# Altium PCB SD171-6.0PCB4.PcbDoc (part 5 of 11)
Units mil, origin at the board's own origin, x right, y up, seen from the top; angles counter-clockwise.
Board outline 5995 x 3921.26 mil, 6 copper layers (Top Layer, GND, Mid-Layer 1, Mid-Layer 2, VCC, Bottom Layer); 477 components, 539 nets, 2143 pads, 1050 vias.
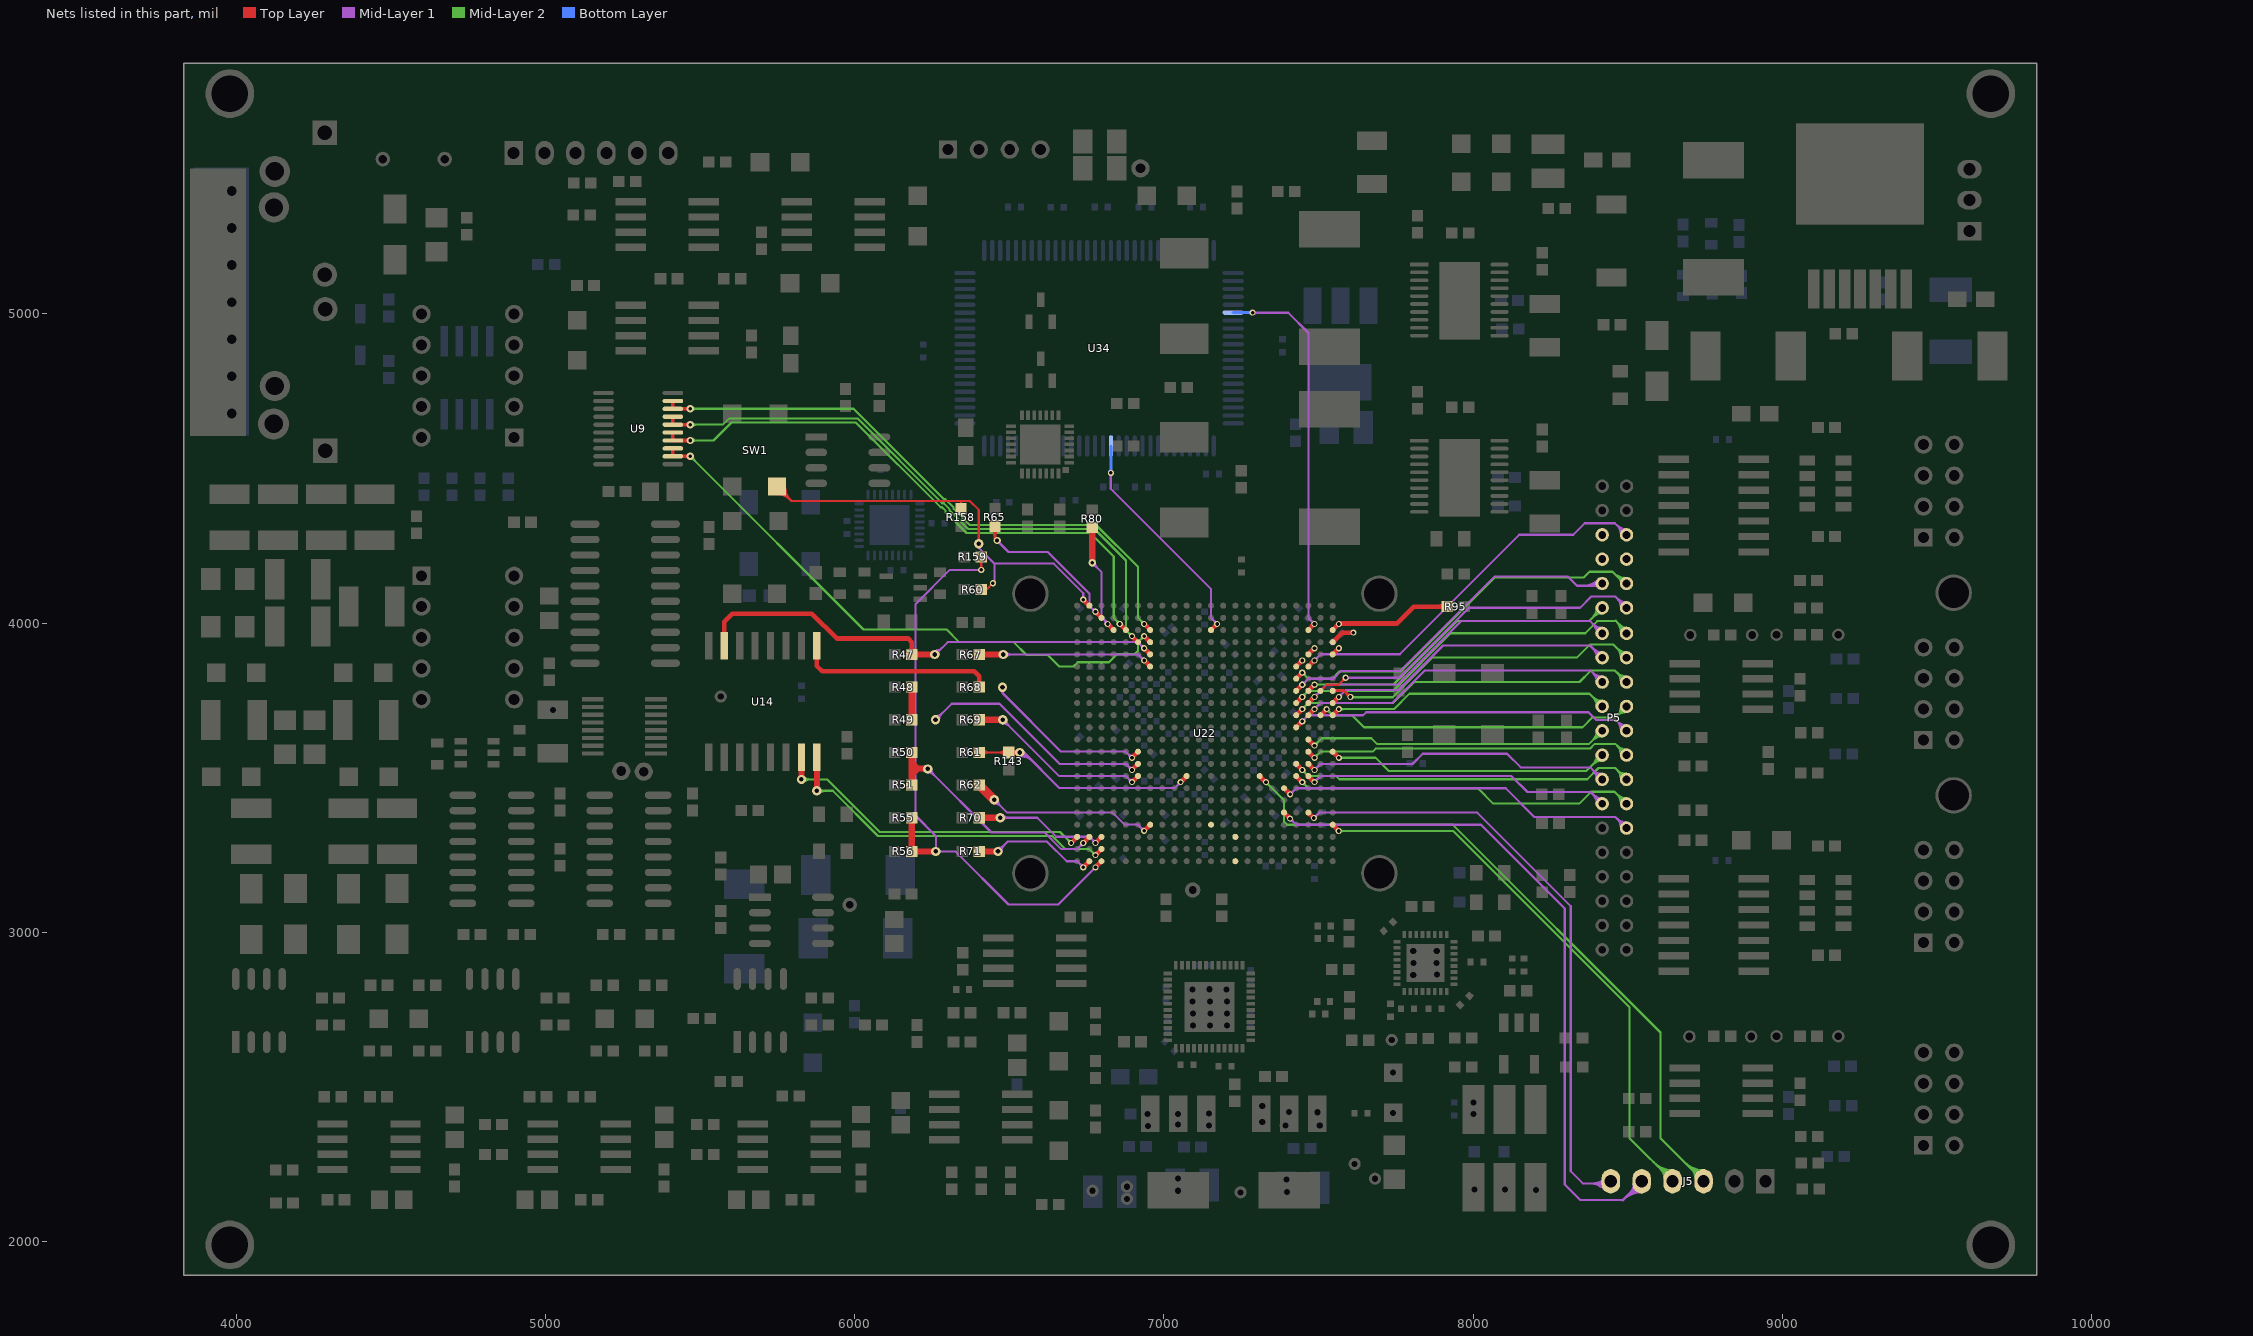
[diagram p9: the nets of this part, all layers, seen from the top]

## Via types
v1: diameter 19.68, hole 11.81, Top Layer to Bottom Layer, 521 vias
v2: diameter 50, hole 25, Top Layer to Bottom Layer, 162 vias
v3: diameter 30, hole 15, Top Layer to Bottom Layer, 100 vias
v4: diameter 39.37, hole 19.68, Top Layer to Bottom Layer, 74 vias
v5: diameter 31.5, hole 15.75, Top Layer to Bottom Layer, 44 vias
v6: diameter 40, hole 20, Top Layer to Bottom Layer, 38 vias
v7: diameter 24, hole 12, Top Layer to Bottom Layer, 33 vias
v8: diameter 47.24, hole 23.62, Top Layer to Bottom Layer, 24 vias
v9: diameter 59.06, hole 31.5, Top Layer to Bottom Layer, 10 vias
v10: diameter 60, hole 30, Top Layer to Bottom Layer, 9 vias
v11: diameter 25.98, hole 12.99, Top Layer to Bottom Layer, tented top, 9 vias
v12: diameter 23.62, hole 11.81, Top Layer to Bottom Layer, 8 vias
v13: diameter 20, hole 12, Top Layer to Bottom Layer, 6 vias
v14: diameter 50, hole 27.56, Top Layer to Bottom Layer, 4 vias
v15: diameter 51.18, hole 27.56, Top Layer to Bottom Layer, 2 vias
v16: diameter 39.37, hole 23.62, Top Layer to Bottom Layer, 2 vias
v17: diameter 80, hole 40, Top Layer to Bottom Layer, 1 vias
v18: diameter 47.24, hole 19.68, Top Layer to Bottom Layer, 1 vias
v19: diameter 47.24, hole 27.56, Top Layer to Bottom Layer, 1 vias
v20: diameter 22.05, hole 11.81, Top Layer to Bottom Layer, 1 vias

## Nets (pads, with @x,y where several pads share a name; then routed paths per layer and width w, separated by ;. In a path a pad name is that pad's centre, name@x,y a point inside that pad or via, vN(x,y) a via of type N, cw(c..) or ccw(c..) an arc to the next point about the centre after c; other vN are vias at no path point) (continued)
FIO6: P5.12 U22.E16 | length 1336.9
  Top Layer w15: U22.E16@7388.52,3465.45 v1(7408.21,3445.76)
  Mid-Layer 1 w7: v1(7408.21,3445.76) 7427.55,3465.1 8105.9,3465.1 8198.5,3372.5 8460.66,3372.5 P5.12@8496.74,3336.42 ; P5.12@8478.59,3336.42 ccw(c8434.76,3336.42) 8465.75,3367.41 ccw(c8496.74,3398.4) P5.12@8496.74,3354.57 ; P5.12@8485.59,3336.42 ccw(c8458.66,3336.42) 8477.7,3355.46 ccw(c8496.74,3374.5) P5.12@8496.74,3347.57 ; 7419.03,3456.59 cw(c7408.21,3467.42) 7408.21,3452.1 ccw(c7408.21,3467.42) 7419.03,3456.59 ; 7419.03,3456.59 ccw(c7429.86,3445.76) 7414.55,3445.76 cw(c7429.86,3445.76) 7419.03,3456.59
FIO7: P5.13 U22.C15 | length 1163.1
  Top Layer w15: U22.C15@7467.26,3504.82 v1(7486.95,3485.13)
  Mid-Layer 1 w7: v1(7486.95,3485.13) 7506.29,3504.47 8124.53,3504.47 8176,3453 8380.16,3453 P5.13@8418,3415.16 ; P5.13@8399.85,3415.16 ccw(c8356.02,3415.16) 8387.01,3446.15 ccw(c8418,3477.14) P5.13@8418,3433.31 ; P5.13@8406.85,3415.16 ccw(c8379.92,3415.16) 8398.96,3434.2 ccw(c8418,3453.24) P5.13@8418,3426.31 ; 7497.77,3495.96 cw(c7486.95,3506.79) 7486.95,3491.47 ccw(c7486.95,3506.79) 7497.77,3495.96 ; 7497.77,3495.96 ccw(c7508.6,3485.13) 7493.29,3485.13 cw(c7508.6,3485.13) 7497.77,3495.96
FIO8: P5.14 U22.D15 | length 1297
  Top Layer w15: U22.D15@7427.89,3504.82 v1(7447.58,3485.13)
  Mid-Layer 2 w7: v1(7447.58,3485.13) 7467.6,3465.1 7534.33,3465.1 7534.43,3465 8016,3465 8065.34,3415.66 8343.66,3415.66 8382,3454 8457.9,3454 P5.14@8496.74,3415.16 ; P5.14@8478.59,3415.16 ccw(c8434.76,3415.16) 8465.75,3446.15 ccw(c8496.74,3477.14) P5.14@8496.74,3433.31 ; P5.14@8485.59,3415.16 ccw(c8458.66,3415.16) 8477.7,3434.2 ccw(c8496.74,3453.24) P5.14@8496.74,3426.31 ; 7458.4,3474.3 cw(c7469.23,3485.13) 7453.92,3485.13 ccw(c7469.23,3485.13) 7458.4,3474.3 ; 7458.4,3474.3 ccw(c7447.58,3463.48) 7447.58,3478.79 cw(c7447.58,3463.48) 7458.4,3474.3
FIO9: P5.15 U22.C14 | length 1174.3
  Top Layer w15: U22.C14@7467.26,3544.19 v1(7486.95,3524.5)
  Mid-Layer 1 w7: v1(7486.95,3524.5) 7506.44,3544 7804,3544 7837,3577 8110,3577 8154,3533 8378.9,3533 P5.15@8418,3493.9 ; P5.15@8399.85,3493.9 ccw(c8356.02,3493.9) 8387.01,3524.89 ccw(c8418,3555.88) P5.15@8418,3512.05 ; P5.15@8406.85,3493.9 ccw(c8379.92,3493.9) 8398.96,3512.94 ccw(c8418,3531.98) P5.15@8418,3505.05 ; 7497.77,3535.33 cw(c7486.95,3546.16) 7486.95,3530.84 ccw(c7486.95,3546.16) 7497.77,3535.33 ; 7497.77,3535.33 ccw(c7508.6,3524.5) 7493.29,3524.5 cw(c7508.6,3524.5) 7497.77,3535.33
FIO10: P5.16 U22.D14 | length 1279.2
  Top Layer w15: U22.D14@7427.89,3544.19 v1(7447.58,3524.5)
  Mid-Layer 2 w7: v1(7447.58,3524.5) 7467.6,3504.47 7557.53,3504.47 7567.6,3494.4 8369.4,3494.4 8406,3531 8459.64,3531 P5.16@8496.74,3493.9 ; P5.16@8478.59,3493.9 ccw(c8434.76,3493.9) 8465.75,3524.89 ccw(c8496.74,3555.88) P5.16@8496.74,3512.05 ; P5.16@8485.59,3493.9 ccw(c8458.66,3493.9) 8477.7,3512.94 ccw(c8496.74,3531.98) P5.16@8496.74,3505.05 ; 7458.4,3513.67 cw(c7469.23,3524.5) 7453.92,3524.5 ccw(c7469.23,3524.5) 7458.4,3513.67 ; 7458.4,3513.67 ccw(c7447.58,3502.85) 7447.58,3518.16 cw(c7447.58,3502.85) 7458.4,3513.67
FIO11: P5.17 U22.A13 | length 1092.5
  Top Layer w15: U22.A13@7546,3583.56 v1(7565.69,3563.87)
  Mid-Layer 2 w7: v1(7565.69,3563.87) 7684.9,3563.87 7727.77,3521 8325,3521 ; 8339,3521 8325,3521 ; P5.17@8399.85,3572.64 cw(c8356.02,3572.64) 8387.01,3541.65 cw(c8418,3510.66) P5.17@8418,3554.48 ; P5.17@8406.85,3572.64 cw(c8379.92,3572.64) 8398.96,3553.6 cw(c8418,3534.56) P5.17@8418,3561.48 ; P5.17@8418,3572.64 8366.36,3521 8325,3521 ; 7581,3563.87 cw(c7581,3579.19) 7570.17,3568.36 ccw(c7581,3579.19) 7581,3563.87 ; 7581,3563.87 ccw(c7581,3548.56) 7570.17,3559.39 cw(c7581,3548.56) 7581,3563.87
FIO12: P5.18 U22.C13 | length 1230.6
  Top Layer w15: U22.C13@7467.26,3583.56 v1(7486.95,3563.87)
  Mid-Layer 2 w7: v1(7486.95,3563.87) 7506.97,3583.9 7675.9,3583.9 7685.5,3593.5 8378.51,3593.5 8394.01,3609 8460.38,3609 P5.18@8496.74,3572.64 ; P5.18@8478.59,3572.64 ccw(c8434.76,3572.64) 8465.75,3603.63 ccw(c8496.74,3634.62) P5.18@8496.74,3590.79 ; P5.18@8485.59,3572.64 ccw(c8458.66,3572.64) 8477.7,3591.68 ccw(c8496.74,3610.72) P5.18@8496.74,3583.79 ; 7497.77,3574.7 cw(c7486.95,3585.53) 7486.95,3570.22 ccw(c7486.95,3585.53) 7497.77,3574.7 ; 7497.77,3574.7 ccw(c7508.6,3563.87) 7493.29,3563.87 cw(c7508.6,3563.87) 7497.77,3574.7
FIO13: P5.19 U22.C12 | length 1153.8
  Top Layer w15: U22.C12@7467.26,3622.93 v1(7486.95,3603.24)
  Mid-Layer 2 w7: v1(7486.95,3603.24) 7510.7,3627 7671,3627 7690,3608 8374.62,3608 P5.19@8418,3651.38 ; P5.19@8399.85,3651.38 cw(c8356.02,3651.38) 8387.01,3620.39 cw(c8418,3589.4) P5.19@8418,3633.22 ; P5.19@8406.85,3651.38 cw(c8379.92,3651.38) 8398.96,3632.34 cw(c8418,3613.3) P5.19@8418,3640.22 ; 7497.77,3614.07 cw(c7486.95,3624.9) 7486.95,3609.59 ccw(c7486.95,3624.9) 7497.77,3614.07 ; 7497.77,3614.07 ccw(c7508.6,3603.24) 7493.29,3603.24 cw(c7508.6,3603.24) 7497.77,3614.07
FIO14: P5.20 U22.D11 | length 1277
  Top Layer w15: U22.D11@7427.89,3662.3 v1(7447.58,3681.99)
  Mid-Layer 1 w7: v1(7447.58,3681.99) 7466.92,3701.33 7564.52,3701.33 7564.69,3701.5 7644.5,3701.5 7654.5,3711.5 8354,3711.5 ; 8357.64,3711.5 8354,3711.5 ; P5.20@8478.59,3651.38 ccw(c8434.76,3651.38) 8465.75,3682.37 ccw(c8496.74,3713.36) P5.20@8496.74,3669.53 ; P5.20@8485.59,3651.38 ccw(c8458.66,3651.38) 8477.7,3670.42 ccw(c8496.74,3689.46) P5.20@8496.74,3662.53 ; P5.20@8496.74,3651.38 8462.12,3686 8399,3686 8373.5,3711.5 8354,3711.5 ; 7458.4,3692.81 cw(c7447.58,3703.64) 7447.58,3688.33 ccw(c7447.58,3703.64) 7458.4,3692.81 ; 7458.4,3692.81 ccw(c7469.23,3681.99) 7453.92,3681.99 cw(c7469.23,3681.99) 7458.4,3692.81
FIO15: P5.21 U22.A10 | length 1076.9
  Top Layer w15: U22.A10@7546,3701.67 v1(7565.69,3721.36)
  Mid-Layer 2 w7: v1(7565.69,3721.36) 7744.36,3721.36 7794,3771 8377.12,3771 P5.21@8418,3730.12 ; P5.21@8399.85,3730.12 ccw(c8356.02,3730.12) 8387.01,3761.11 ccw(c8418,3792.1) P5.21@8418,3748.27 ; P5.21@8406.85,3730.12 ccw(c8379.92,3730.12) 8398.96,3749.16 ccw(c8418,3768.2) P5.21@8418,3741.27 ; 7581,3721.36 cw(c7581,3736.67) 7570.17,3725.84 ccw(c7581,3736.67) 7581,3721.36 ; 7581,3721.36 ccw(c7581,3706.04) 7570.17,3716.87 cw(c7581,3706.04) 7581,3721.36
FIO16: P5.22 U22.B10 | length 1209.9
  Top Layer w15: U22.B10@7506.63,3701.67 v1(7526.32,3721.36)
  Mid-Layer 2 w7: v1(7526.32,3721.36) 7546.34,3701.33 7608.67,3701.33 7647.5,3662.5 8354.5,3662.5 8386,3694 8460.62,3694 P5.22@8496.74,3730.12 ; P5.22@8478.59,3730.12 cw(c8434.76,3730.12) 8465.75,3699.13 cw(c8496.74,3668.14) P5.22@8496.74,3711.97 ; P5.22@8485.59,3730.12 cw(c8458.66,3730.12) 8477.7,3711.08 cw(c8496.74,3692.04) P5.22@8496.74,3718.97 ; 7537.14,3710.53 cw(c7547.97,3721.36) 7532.66,3721.36 ccw(c7547.97,3721.36) 7537.14,3710.53 ; 7537.14,3710.53 ccw(c7526.32,3699.7) 7526.32,3715.01 cw(c7526.32,3699.7) 7537.14,3710.53
FIO17: P5.23 U22.C10 | length 1185.2
  Top Layer w15: U22.C10@7467.26,3701.67 v1(7486.95,3721.36)
  Mid-Layer 1 w7: v1(7486.95,3721.36) 7506.29,3740.7 7737.7,3740.7 7843,3846 8380.86,3846 P5.23@8418,3808.86 ; P5.23@8399.85,3808.86 ccw(c8356.02,3808.86) 8387.01,3839.85 ccw(c8418,3870.84) P5.23@8418,3827.01 ; P5.23@8406.85,3808.86 ccw(c8379.92,3808.86) 8398.96,3827.9 ccw(c8418,3846.94) P5.23@8418,3820.01 ; 7497.77,3732.18 cw(c7486.95,3743.01) 7486.95,3727.7 ccw(c7486.95,3743.01) 7497.77,3732.18 ; 7497.77,3732.18 ccw(c7508.6,3721.36) 7493.29,3721.36 cw(c7508.6,3721.36) 7497.77,3732.18
FIO18: P5.24 U22.D10 | length 1303.3
  Top Layer w15: U22.D10@7427.89,3701.67 v1(7447.58,3721.36)
  Mid-Layer 2 w7: v1(7447.58,3721.36) 7466.92,3740.7 7740.7,3740.7 7809.36,3809.36 8344.36,3809.36 8381,3846 8459.6,3846 P5.24@8496.74,3808.86 ; P5.24@8478.59,3808.86 ccw(c8434.76,3808.86) 8465.75,3839.85 ccw(c8496.74,3870.84) P5.24@8496.74,3827.01 ; P5.24@8485.59,3808.86 ccw(c8458.66,3808.86) 8477.7,3827.9 ccw(c8496.74,3846.94) P5.24@8496.74,3820.01 ; 7458.4,3732.18 cw(c7447.58,3743.01) 7447.58,3727.7 ccw(c7447.58,3743.01) 7458.4,3732.18 ; 7458.4,3732.18 ccw(c7469.23,3721.36) 7453.92,3721.36 cw(c7469.23,3721.36) 7458.4,3732.18
FIO19: P5.25 U22.A9 | length 1124.6
  Top Layer w15: U22.A9@7546,3741.04 v1(7565.69,3760.73)
  Mid-Layer 1 w7: v1(7565.69,3760.73) 7587.96,3783 7759,3783 7903,3927 8378.6,3927 P5.25@8418,3887.6 ; P5.25@8399.85,3887.6 ccw(c8356.02,3887.6) 8387.01,3918.59 ccw(c8418,3949.58) P5.25@8418,3905.75 ; P5.25@8406.85,3887.6 ccw(c8379.92,3887.6) 8398.96,3906.64 ccw(c8418,3925.68) P5.25@8418,3898.75 ; 7576.51,3771.55 cw(c7565.69,3782.38) 7565.69,3767.07 ccw(c7565.69,3782.38) 7576.51,3771.55 ; 7576.51,3771.55 ccw(c7587.34,3760.73) 7572.03,3760.73 cw(c7587.34,3760.73) 7576.51,3771.55
FIO20: P5.26 U22.A8 | length 1268.7
  Top Layer w10: U22.A8@7546,3780.41 7547.16,3781.57 7581.43,3781.57 v1@7603,3760 ; U22.A8@7549.42,3776.99 cw(c7560.49,3765.92) 7560.49,3781.57 ccw(c7560.49,3765.92) U22.A8@7549.42,3776.99 ; 7593.49,3769.51 ccw(c7603,3779.01) 7603,3765.57 cw(c7603,3779.01) 7593.49,3769.51 ; 7595.25,3767.75 cw(c7588.22,3760.73) 7598.16,3760.73 ccw(c7588.22,3760.73) 7595.25,3767.75
  Mid-Layer 2 w7: v1@7603,3760 7740,3760 7868.1,3888.1 8336.1,3888.1 8378,3930 8454.34,3930 P5.26@8496.74,3887.6 ; P5.26@8478.59,3887.6 ccw(c8434.76,3887.6) 8465.75,3918.59 ccw(c8496.74,3949.58) P5.26@8496.74,3905.75 ; P5.26@8485.59,3887.6 ccw(c8458.66,3887.6) 8477.7,3906.64 ccw(c8496.74,3925.68) P5.26@8496.74,3898.75 ; v1@7607.48,3756.24 cw(c7616.56,3747.17) 7616.56,3760 ccw(c7616.56,3747.17) v1@7607.48,3756.24 ; v1@7607.48,3765.21 ccw(c7620.06,3777.79) 7620.06,3760 cw(c7620.06,3777.79) v1@7607.48,3765.21
  other v1: 7603,3760.73
FIO21: P5.27 U22.C9 | length 1237
  Top Layer w15: U22.C9@7467.26,3741.04 v1(7486.95,3760.73)
  Mid-Layer 1 w7: v1(7486.95,3760.73) 7527.22,3801 7756.92,3801 7962.92,4007 8377.34,4007 P5.27@8418,3966.34 ; P5.27@8399.85,3966.34 ccw(c8356.02,3966.34) 8387.01,3997.33 ccw(c8418,4028.32) P5.27@8418,3984.49 ; P5.27@8406.85,3966.34 ccw(c8379.92,3966.34) 8398.96,3985.38 ccw(c8418,4004.42) P5.27@8418,3977.49 ; 7497.77,3771.55 cw(c7486.95,3782.38) 7486.95,3767.07 ccw(c7486.95,3782.38) 7497.77,3771.55 ; 7497.77,3771.55 ccw(c7508.6,3760.73) 7493.29,3760.73 cw(c7508.6,3760.73) 7497.77,3771.55
FIO22: P5.28 U22.D9 | length 1347.9
  Top Layer w15: U22.D9@7427.89,3741.04 v1(7447.58,3760.73)
  Mid-Layer 2 w7: v1(7447.58,3760.73) 7466.92,3780.07 7494.96,3780.07 7495.03,3780 7518.24,3780 7518.3,3780.07 7534.33,3780.07 7534.4,3780 7557.61,3780 7557.67,3780.07 7741.07,3780.07 7927.84,3966.84 8362.84,3966.84 8402,4006 8463,4006 8496.74,3972.26 P5.28@8496.74,3966.34 ; 8461.56,4007.44 cw(c8420.47,3966.34) P5.28@8478.59,3966.34 ; 8473.51,3995.49 cw(c8444.37,3966.34) P5.28@8485.59,3966.34 ; 8475.86,3993.14 ccw(c8496.74,4014.03) P5.28@8496.74,3984.49 ; 7458.4,3771.55 cw(c7447.58,3782.38) 7447.58,3767.07 ccw(c7447.58,3782.38) 7458.4,3771.55 ; 7458.4,3771.55 ccw(c7469.23,3760.73) 7453.92,3760.73 cw(c7469.23,3760.73) 7458.4,3771.55
FIO23: P5.29 U22.C8 | length 1245.3
  Top Layer w15: U22.C8@7467.26,3780.41 v1(7486.95,3800.1)
  Mid-Layer 2 w7: v1(7486.95,3800.1) 7487.76,3800.91 7742.91,3800.91 7948,4006 8374.98,4006 P5.29@8418,4049.02 ; P5.29@8399.85,4049.02 cw(c8356.02,4049.02) 8387.01,4018.03 cw(c8418,3987.04) P5.29@8418,4030.86 ; P5.29@8406.85,4049.02 cw(c8379.92,4049.02) 8398.96,4029.98 cw(c8418,4010.94) P5.29@8418,4037.86 ; v1@7491.43,3795.61 cw(c7504.23,3782.82) 7504.23,3800.91 ; v1@7491.43,3795.61 cw(c7504.23,3782.82) 7504.23,3800.91 ; v1@7491.43,3795.61 cw(c7504.23,3782.82) 7504.23,3800.91 ; v1@7491.43,3804.58 ccw(c7500.29,3813.44) 7500.29,3800.91 ; v1@7491.43,3804.58 ccw(c7500.29,3813.44) 7500.29,3800.91 ; v1@7491.43,3804.58 ccw(c7500.29,3813.44) 7500.29,3800.91
FIO24: P5.30 U22.B8 | length 1459.1
  Top Layer w7: U22.B8@7506.63,3780.41 7526.22,3800 7565,3800 v1(7588,3823) ; 7579.79,3816.04 cw(c7589.99,3813.31) v1@7587.87,3823.64 ; 7581.04,3814.79 ccw(c7578.31,3824.99) v1@7588.64,3822.87 ; 7517.46,3791.24 ccw(c7528.28,3780.41) 7512.97,3780.41 cw(c7528.28,3780.41) 7517.46,3791.24 ; 7517.46,3791.24 cw(c7506.63,3802.06) 7506.63,3786.75 ccw(c7506.63,3802.06) 7517.46,3791.24 ; 7577.17,3812.17 cw(c7588,3801.35) v1@7588,3816.66 ; 7577.17,3812.17 ccw(c7566.35,3823) v1@7581.66,3823 ; 7577.17,3812.17 cw(c7588,3801.35) v1@7588,3816.66 ; 7577.17,3812.17 ccw(c7566.35,3823) v1@7581.66,3823 ; 7577.17,3812.17 ccw(c7566.35,3823) v1@7581.66,3823 ; 7577.17,3812.17 cw(c7588,3801.35) v1@7588,3816.66
  Mid-Layer 1 w7: v1(7588,3823) 7760.54,3823 7987.06,4049.52 8346.52,4049.52 8383,4086 8460,4086 8496.74,4049.26 P5.30@8496.74,4049.02 ; 8465.58,4080.42 cw(c8434.17,4049.02) P5.30@8478.59,4049.02 ; 8466.17,4079.83 ccw(c8496.74,4110.41) P5.30@8496.74,4067.17 ; 8477.53,4068.47 cw(c8458.07,4049.02) P5.30@8485.59,4049.02 ; 8478.12,4067.88 ccw(c8496.74,4086.51) P5.30@8496.74,4060.17 ; v1@7592.48,3818.52 cw(c7603.31,3807.69) 7603.31,3823 ; v1@7592.48,3818.52 cw(c7603.31,3807.69) 7603.31,3823 ; v1@7592.48,3818.52 cw(c7603.31,3807.69) 7603.31,3823 ; v1@7592.48,3827.48 ccw(c7603.31,3838.31) 7603.31,3823 ; v1@7592.48,3827.48 ccw(c7603.31,3838.31) 7603.31,3823 ; v1@7592.48,3827.48 ccw(c7603.31,3838.31) 7603.31,3823
FIO25: P5.31 U22.D8 | length 1367.4
  Top Layer w15: U22.D8@7427.89,3780.41 v1(7447.58,3800.1)
  Mid-Layer 1 w7: v1(7447.58,3800.1) 7466.92,3819.44 7548.44,3819.44 7574,3845 7764.15,3845 8069.15,4150 8307,4150 8336.5,4120.5 8410.74,4120.5 P5.31@8418,4127.76 ; 8356.66,4120.5 ccw(c8356.66,4189.1) P5.31@8405.16,4140.59 ; 8373.55,4120.5 ccw(c8373.55,4172.2) P5.31@8410.11,4135.64 ; 8390.45,4120.5 ccw(c8390.45,4155.3) P5.31@8415.06,4130.69 ; 8391.69,4120.5 cw(c8391.69,4101.45) P5.31@8405.16,4114.92 ; v1@7447.58,3806.44 ccw(c7447.58,3821.75) 7458.4,3810.92 ; v1@7447.58,3806.44 ccw(c7447.58,3821.75) 7458.4,3810.92 ; v1@7447.58,3806.44 ccw(c7447.58,3821.75) 7458.4,3810.92 ; v1@7453.92,3800.1 cw(c7469.23,3800.1) 7458.4,3810.92 ; v1@7453.92,3800.1 cw(c7469.23,3800.1) 7458.4,3810.92 ; v1@7453.92,3800.1 cw(c7469.23,3800.1) 7458.4,3810.92
FIO26: P5.32 U22.D7 | length 1436.8
  Top Layer w15: U22.D7@7427.89,3819.78 v1(7447.58,3839.47)
  Mid-Layer 2 w7: v1(7447.58,3839.47) 7467.04,3820 7544,3820 7567,3843 7766.62,3843 8070.62,4147 8358,4147 8377,4166 8451,4166 8489.24,4127.76 P5.32@8496.74,4127.76 ; 8454.75,4162.25 ccw(c8494.3,4201.8) P5.32@8496.14,4145.9 ; 8466.16,4150.84 ccw(c8495.03,4179.7) P5.32@8496.37,4138.9 ; 8471.05,4145.95 cw(c8452.86,4127.76) P5.32@8478.59,4127.76 ; 8477.58,4139.42 ccw(c8495.75,4157.6) P5.32@8496.6,4131.91 ; v1@7447.58,3833.12 cw(c7447.58,3817.81) 7458.4,3828.64 ; v1@7447.58,3833.12 cw(c7447.58,3817.81) 7458.4,3828.64 ; v1@7447.58,3833.12 cw(c7447.58,3817.81) 7458.4,3828.64 ; v1@7453.92,3839.47 ccw(c7469.23,3839.47) 7458.4,3828.64 ; v1@7453.92,3839.47 ccw(c7469.23,3839.47) 7458.4,3828.64 ; v1@7453.92,3839.47 ccw(c7469.23,3839.47) 7458.4,3828.64
FIO27: P5.33
FIO28: P5.34
FIO29: P5.35
FIO30: P5.36 U22.C6 | length 1420.7
  Top Layer w15: U22.C6@7467.26,3859.15 v1(7486.95,3878.84)
  Mid-Layer 1 w7: v1(7486.95,3878.84) 7506.97,3898.86 7762.86,3898.86 8149.74,4285.74 8324,4285.74 8361,4322.74 8361,4323 8458.98,4323 P5.36@8496.74,4285.24 ; P5.36@8478.59,4285.24 ccw(c8434.76,4285.24) 8465.75,4316.23 ccw(c8496.74,4347.22) P5.36@8496.74,4303.39 ; P5.36@8485.59,4285.24 ccw(c8458.66,4285.24) 8477.7,4304.28 ccw(c8496.74,4323.32) P5.36@8496.74,4296.39 ; v1@7486.95,3885.18 ccw(c7486.95,3900.49) 7497.77,3889.66 ; v1@7486.95,3885.18 ccw(c7486.95,3900.49) 7497.77,3889.66 ; v1@7486.95,3885.18 ccw(c7486.95,3900.49) 7497.77,3889.66 ; v1@7493.29,3878.84 cw(c7508.6,3878.84) 7497.77,3889.66 ; v1@7493.29,3878.84 cw(c7508.6,3878.84) 7497.77,3889.66 ; v1@7493.29,3878.84 cw(c7508.6,3878.84) 7497.77,3889.66
FIO31: U22.D6 | length 27.8
  Top Layer w15: U22.D6@7427.89,3859.15 v1(7447.58,3878.84)
FIO32: U22.A5 | length 27.8
  Top Layer w15: U22.A5@7546,3898.52 v1(7565.69,3918.21)
FIO33: U22.C5 | length 27.8
  Top Layer w15: U22.C5@7467.26,3898.52 v1(7486.95,3918.21)
FIO34: U22.A4 | length 79.9
  Top Layer w15: U22.A4@7546,3937.89 7577.11,3969 v1(7613,3969)
FJDQ1A: U9.2 U9.3 U22.T4 | length 2102.1
  Top Layer w11.81: U9.3@5411.2,4565.02 U9.2@5411.2,4539.43 v12(5467.57,4539.43) ; 5453.31,4539.43 cw(c5453.31,4525.18) v12@5463.39,4535.26 ; 5453.31,4539.43 ccw(c5453.31,4553.69) v12@5463.39,4543.61 ; 5453.31,4539.43 cw(c5453.31,4525.18) v12@5463.39,4535.26 ; 5453.31,4539.43 ccw(c5453.31,4553.69) v12@5463.39,4543.61 ; 5453.31,4539.43 ccw(c5453.31,4553.69) v12@5463.39,4543.61 ; 5453.31,4539.43 cw(c5453.31,4525.18) v12@5463.39,4535.26
  Top Layer w15: v1(6935.77,3957.57) U22.T4@6955.45,3937.89
  Mid-Layer 2 w7: v12(5467.57,4539.43) 6028,3979 6297,3979 6338,3938 6514,3938 6555.45,3896.55 6624.45,3896.55 6661.51,3859.49 6707.55,3859.49 6721.06,3873 6822,3873 6847.86,3898.86 6904.4,3898.86 6915.73,3910.19 6915.73,3937.54 v1(6935.77,3957.57) ; v1@6929.42,3957.57 cw(c6914.11,3957.57) 6924.94,3946.75 cw(c6935.77,3935.92) v1@6935.77,3951.23 ; v12@5467.57,4531.12 cw(c5467.57,4511.06) 5481.75,4525.25 ; v12@5467.57,4531.12 cw(c5467.57,4511.06) 5481.75,4525.25 ; v12@5467.57,4531.12 cw(c5467.57,4511.06) 5481.75,4525.25 ; v12@5475.88,4539.43 ccw(c5495.94,4539.43) 5481.75,4525.25 ; v12@5475.88,4539.43 ccw(c5495.94,4539.43) 5481.75,4525.25 ; v12@5475.88,4539.43 ccw(c5495.94,4539.43) 5481.75,4525.25
FJDQ1B: U9.4 U9.5 U22.V3 | length 2146.7
  Top Layer w11.81: U9.5@5411.2,4616.2 U9.4@5411.2,4590.61 v12(5467.57,4590.61) ; 5453.31,4590.61 cw(c5453.31,4576.36) v12@5463.39,4586.44 ; 5453.31,4590.61 ccw(c5453.31,4604.87) v12@5463.39,4594.79 ; 5453.31,4590.61 cw(c5453.31,4576.36) v12@5463.39,4586.44 ; 5453.31,4590.61 ccw(c5453.31,4604.87) v12@5463.39,4594.79 ; 5453.31,4590.61 ccw(c5453.31,4604.87) v12@5463.39,4594.79 ; 5453.31,4590.61 cw(c5453.31,4576.36) v12@5463.39,4586.44
  Top Layer w15: v1(6857.02,3996.95) U22.V3@6876.71,3977.26
  Mid-Layer 2 w7: v12(5467.57,4590.61) 5542.61,4590.61 5601,4649 6003,4649 6277.49,4374.51 6282.09,4374.51 6293.51,4363.09 6293.51,4358.49 6361,4291 6762,4291 6837.68,4215.32 6837.68,4016.29 v1(6857.02,3996.95) ; v12@5473.44,4584.74 cw(c5487.63,4570.55) 5487.63,4590.61 ; v12@5473.44,4584.74 cw(c5487.63,4570.55) 5487.63,4590.61 ; v12@5473.44,4584.74 cw(c5487.63,4570.55) 5487.63,4590.61 ; v12@5473.44,4596.49 ccw(c5487.63,4610.68) 5487.63,4590.61 ; v12@5473.44,4596.49 ccw(c5487.63,4610.68) 5487.63,4590.61 ; v12@5473.44,4596.49 ccw(c5487.63,4610.68) 5487.63,4590.61 ; 6846.19,4007.77 cw(c6835.37,3996.95) v1@6850.68,3996.95 ; 6846.19,4007.77 ccw(c6857.02,4018.6) v1@6857.02,4003.29 ; 6846.19,4007.77 cw(c6835.37,3996.95) v1@6850.68,3996.95 ; 6846.19,4007.77 ccw(c6857.02,4018.6) v1@6857.02,4003.29 ; 6846.19,4007.77 ccw(c6857.02,4018.6) v1@6857.02,4003.29 ; 6846.19,4007.77 cw(c6835.37,3996.95) v1@6850.68,3996.95
FJDQ2A: U9.6 U9.7 U22.U4 | length 2207.2
  Top Layer w11.81: U9.7@5411.2,4667.39 U9.6@5411.2,4641.8 v12(5467.57,4641.8) ; 5453.31,4641.8 cw(c5453.31,4627.54) v12@5463.39,4637.62 ; 5453.31,4641.8 ccw(c5453.31,4656.05) v12@5463.39,4645.97 ; 5453.31,4641.8 cw(c5453.31,4627.54) v12@5463.39,4637.62 ; 5453.31,4641.8 ccw(c5453.31,4656.05) v12@5463.39,4645.97 ; 5453.31,4641.8 ccw(c5453.31,4656.05) v12@5463.39,4645.97 ; 5453.31,4641.8 cw(c5453.31,4627.54) v12@5463.39,4637.62
  Top Layer w15: v1(6896.39,3957.58) U22.U4@6916.08,3937.89
  Mid-Layer 2 w7: v12(5467.57,4641.8) 5572.8,4641.8 5593,4662 6008.38,4662 6282.87,4387.51 6287.47,4387.51 6306.51,4368.47 6306.51,4363.87 6366.38,4304 6775,4304 6877.05,4201.95 6877.05,3976.92 v1(6896.39,3957.58) ; v12@5473.44,4635.92 cw(c5487.63,4621.73) 5487.63,4641.8 ; v12@5473.44,4635.92 cw(c5487.63,4621.73) 5487.63,4641.8 ; v12@5473.44,4635.92 cw(c5487.63,4621.73) 5487.63,4641.8 ; v12@5473.44,4647.67 ccw(c5487.63,4661.86) 5487.63,4641.8 ; v12@5473.44,4647.67 ccw(c5487.63,4661.86) 5487.63,4641.8 ; v12@5473.44,4647.67 ccw(c5487.63,4661.86) 5487.63,4641.8 ; 6885.56,3968.4 cw(c6874.74,3957.58) v1@6890.05,3957.58 ; 6885.56,3968.4 ccw(c6896.39,3979.23) v1@6896.39,3963.92 ; 6885.56,3968.4 cw(c6874.74,3957.58) v1@6890.05,3957.58 ; 6885.56,3968.4 ccw(c6896.39,3979.23) v1@6896.39,3963.92 ; 6885.56,3968.4 ccw(c6896.39,3979.23) v1@6896.39,3963.92 ; 6885.56,3968.4 cw(c6874.74,3957.58) v1@6890.05,3957.58
FJDQ2B: U9.8 U9.9 U22.T3 | length 2199.3
  Top Layer w11.81: U9.9@5411.2,4718.57 U9.8@5411.2,4692.98 v12(5467.57,4692.98) ; 5453.31,4692.98 cw(c5453.31,4678.72) v12@5463.39,4688.8 ; 5453.31,4692.98 ccw(c5453.31,4707.23) v12@5463.39,4697.15 ; 5453.31,4692.98 cw(c5453.31,4678.72) v12@5463.39,4688.8 ; 5453.31,4692.98 ccw(c5453.31,4707.23) v12@5463.39,4697.15 ; 5453.31,4692.98 ccw(c5453.31,4707.23) v12@5463.39,4697.15 ; 5453.31,4692.98 cw(c5453.31,4678.72) v12@5463.39,4688.8
  Top Layer w15: v1(6935.76,3996.95) U22.T3@6955.45,3977.26
  Mid-Layer 2 w7: v12(5467.57,4692.98) 5995.79,4692.98 6288.26,4400.51 6292.86,4400.51 6319.51,4373.86 6319.51,4369.26 6371.77,4317 6780.38,4317 6915.73,4181.65 6915.73,4016.97 v1(6935.76,3996.95) ; v12@5473.44,4687.1 cw(c5487.63,4672.91) 5487.63,4692.98 ; v12@5473.44,4687.1 cw(c5487.63,4672.91) 5487.63,4692.98 ; v12@5473.44,4687.1 cw(c5487.63,4672.91) 5487.63,4692.98 ; v12@5473.44,4698.85 ccw(c5487.63,4713.04) 5487.63,4692.98 ; v12@5473.44,4698.85 ccw(c5487.63,4713.04) 5487.63,4692.98 ; v12@5473.44,4698.85 ccw(c5487.63,4713.04) 5487.63,4692.98 ; 6924.93,4007.77 cw(c6914.11,3996.95) v1@6929.42,3996.95 ; 6924.93,4007.77 ccw(c6935.76,4018.6) v1@6935.76,4003.29 ; 6924.93,4007.77 cw(c6914.11,3996.95) v1@6929.42,3996.95 ; 6924.93,4007.77 ccw(c6935.76,4018.6) v1@6935.76,4003.29 ; 6924.93,4007.77 ccw(c6935.76,4018.6) v1@6935.76,4003.29 ; 6924.93,4007.77 cw(c6914.11,3996.95) v1@6929.42,3996.95
FPGA_AWAKE: R62.2 U22.T19 | length 758.4
  Top Layer w15: v1(6935.76,3327.65) U22.T19@6955.45,3347.34
  Top Layer w30: R62.2@6402,3476 6450,3428 v3(6451,3428)
  Mid-Layer 1 w7: v3(6451,3428) 6492.64,3386.36 6834.64,3386.36 6873.32,3347.68 6915.73,3347.68 v1(6935.76,3327.65) ; 6470.63,3408.37 cw(c6490.26,3428) 6462.5,3428 ccw(c6490.26,3428) 6470.63,3408.37 ; 6470.63,3408.37 ccw(c6451,3388.74) 6451,3416.5 cw(c6451,3388.74) 6470.63,3408.37 ; 6924.93,3338.48 cw(c6914.11,3327.65) 6929.42,3327.65 ccw(c6914.11,3327.65) 6924.93,3338.48 ; 6924.93,3338.48 ccw(c6935.76,3349.31) 6935.76,3333.99 cw(c6935.76,3349.31) 6924.93,3338.48
FPGA_B_MISO2: R48.1 R49.2 | length 105.5
  Top Layer w20: R49.2@6184,3687 R48.1@6184,3792.5
FPGA_B_MISO3: R68.1 U14.1 | length 639.2
  Top Layer w15: U14.1@5877,3926 5877,3861 5894,3844 6386,3844 6402,3828 R68.1@6402,3792.5
FPGA_CCLK: U14.16 U22.Y21 | length 1259.4
  Top Layer w15: v1(6778.28,3248.91) U22.Y21@6797.97,3268.6
  Top Layer w20: v3(5877,3457) U14.16@5877,3565.76
  Mid-Layer 2 w7: v3(5877,3457) 5928.62,3457 6074.62,3311 6638.14,3311 6680.2,3268.94 6758.25,3268.94 v1(6778.28,3248.91) ; 5904.76,3457 cw(c5904.76,3484.76) 5885.13,3465.13 ccw(c5904.76,3484.76) 5904.76,3457 ; 5904.76,3457 ccw(c5904.76,3429.24) 5885.13,3448.87 cw(c5904.76,3429.24) 5904.76,3457 ; 6767.45,3259.74 cw(c6756.63,3248.91) 6771.94,3248.91 ccw(c6756.63,3248.91) 6767.45,3259.74 ; 6767.45,3259.74 ccw(c6778.28,3270.57) 6778.28,3255.25 cw(c6778.28,3270.57) 6767.45,3259.74
FPGA_CMP_CS_B: R70.2 U22.Y20 | length 634.4
  Top Layer w15: v1(6778.28,3288.28) U22.Y20@6797.97,3307.97
  Top Layer w20: R70.2@6402,3370 v3(6470,3370) ; 6422.31,3370 ccw(c6422.31,3350.69) 6408.66,3364.34 cw(c6422.31,3350.69) 6422.31,3370 ; 6422.31,3370 cw(c6422.31,3389.31) 6408.66,3375.66 ccw(c6422.31,3389.31) 6422.31,3370
  Mid-Layer 1 w7: v3(6470,3370) 6590,3370 6651.69,3308.31 6758.94,3308.31 6778.28,3288.97 v1(6778.28,3288.28) ; 6497.76,3370 cw(c6497.76,3397.76) 6478.13,3378.13 ccw(c6497.76,3397.76) 6497.76,3370 ; 6497.76,3370 ccw(c6497.76,3342.24) 6478.13,3361.87 cw(c6497.76,3342.24) 6497.76,3370 ; 6766.97,3300.28 cw(c6754.97,3288.28) 6771.94,3288.28 ccw(c6754.97,3288.28) 6766.97,3300.28 ; 6768.62,3298.62 ccw(c6778.28,3308.28) 6778.28,3294.62 cw(c6778.28,3308.28) 6768.62,3298.62
FPGA_DONE: R55.1 R56.1 R159.2 U22.Y22 | length 2162.6
  Top Layer w7: v13(6409,4172) R159.2@6409,4214
  Top Layer w15: v1(6778.28,3209.54) U22.Y22@6797.97,3229.23
  Top Layer w20: R55.1@6184,3370 R56.1@6184,3261 v3(6262,3261) ; 6184,3280.31 ccw(c6203.31,3280.31) 6189.66,3266.66 cw(c6203.31,3280.31) 6184,3280.31 ; 6184,3280.31 cw(c6164.69,3280.31) 6178.34,3266.66 ccw(c6164.69,3280.31) 6184,3280.31 ; 6184,3350.69 ccw(c6164.69,3350.69) 6178.34,3364.34 cw(c6164.69,3350.69) 6184,3350.69 ; 6184,3350.69 cw(c6203.31,3350.69) 6189.66,3364.34 ccw(c6203.31,3350.69) 6184,3350.69 ; 6204.31,3261 ccw(c6204.31,3241.69) 6190.66,3255.34 cw(c6204.31,3241.69) 6204.31,3261 ; 6204.31,3261 cw(c6204.31,3280.31) 6190.66,3266.66 ccw(c6204.31,3280.31) 6204.31,3261
  Mid-Layer 1 w7: v13(6409,4172) 6307,4172 6196,4061 6196,3377 6262,3311 v3(6262,3261) 6325,3261 6497,3089 6657.74,3089 v1(6778.28,3209.54)
FPGA_HSWAPEN: R95.2 U22.A3 | length 540.4
  Top Layer w15: U22.A3@7546,3977.26 v1(7565.69,3996.95) 7566.99,3998.25 7753.25,3998.25 7808,4053 7895,4053 ; R95.2@7917,4053 7895,4053 ; 7890.65,4053 ccw(c7890.65,4078.35) 7908.58,4060.42 cw(c7890.65,4078.35) 7890.65,4053 ; 7890.65,4053 cw(c7890.65,4027.65) 7908.58,4045.58 ccw(c7890.65,4027.65) 7890.65,4053 ; 7895,4053 ccw(c7895,4068.75) 7907.6,4059.3 cw(c7895,4068.75) 7895,4053 ; 7895,4053 cw(c7895,4037.25) 7907.6,4046.7 ccw(c7895,4037.25) 7895,4053
FPGA_INIT_B: R67.2 U22.T6 | length 877
  Top Layer w15: v1(6935.76,3878.84) U22.T6@6955.45,3859.15
  Top Layer w20: R67.2@6402,3898 6480,3898 v3(6480.18,3898.18) ; 6422.31,3898 ccw(c6422.31,3878.69) 6408.66,3892.34 cw(c6422.31,3878.69) 6422.31,3898 ; 6422.31,3898 cw(c6422.31,3917.31) 6408.66,3903.66 ccw(c6422.31,3917.31) 6422.31,3898
  Mid-Layer 1 w7: v3(6480.18,3898.18) 6916.42,3898.18 v1(6935.76,3878.84) ; v3@6488.31,3890.05 cw(c6507.94,3870.41) 6507.94,3898.18 ; v3@6488.31,3890.05 cw(c6507.94,3870.41) 6507.94,3898.18 ; v3@6488.31,3890.05 cw(c6507.94,3870.41) 6507.94,3898.18 ; v3@6488.31,3890.05 cw(c6507.94,3870.41) 6507.94,3898.18 ; v3@6488.31,3906.31 ccw(c6507.94,3925.94) 6507.94,3898.18 ; v3@6488.31,3906.31 ccw(c6507.94,3925.94) 6507.94,3898.18 ; v3@6488.31,3906.31 ccw(c6507.94,3925.94) 6507.94,3898.18 ; v3@6488.31,3906.31 ccw(c6507.94,3925.94) 6507.94,3898.18 ; 6924.93,3889.66 cw(c6914.11,3878.84) v1@6929.42,3878.84 ; 6924.93,3889.66 ccw(c6935.76,3900.49) v1@6935.76,3885.18 ; 6924.93,3889.66 cw(c6914.11,3878.84) v1@6929.42,3878.84 ; 6924.93,3889.66 ccw(c6935.76,3900.49) v1@6935.76,3885.18 ; 6924.93,3889.66 ccw(c6935.76,3900.49) v1@6935.76,3885.18 ; 6924.93,3889.66 cw(c6914.11,3878.84) v1@6929.42,3878.84
FPGA_M0: R71.2 U22.AA22 | length 608.6
  Top Layer w15: v1(6738.91,3209.54) U22.AA22@6758.6,3229.23
  Top Layer w20: R71.2@6402,3261 v3(6463,3261) ; 6422.31,3261 ccw(c6422.31,3241.69) 6408.66,3255.34 cw(c6422.31,3241.69) 6422.31,3261 ; 6422.31,3261 cw(c6422.31,3280.31) 6408.66,3266.66 ccw(c6422.31,3280.31) 6422.31,3261
  Mid-Layer 1 w7: v3(6463,3261) 6495,3293 6621,3293 6685,3229 6719.45,3229 v1(6738.91,3209.54) ; 6482.63,3280.63 cw(c6463,3300.26) 6463,3272.5 ccw(c6463,3300.26) 6482.63,3280.63 ; 6482.63,3280.63 ccw(c6502.26,3261) 6474.5,3261 cw(c6502.26,3261) 6482.63,3280.63 ; 6728.08,3220.37 cw(c6717.26,3209.54) 6732.57,3209.54 ccw(c6717.26,3209.54) 6728.08,3220.37 ; 6728.08,3220.37 ccw(c6738.91,3231.2) 6738.91,3215.88 cw(c6738.91,3231.2) 6728.08,3220.37
FPGA_M1: R69.2 U22.U15 | length 758.2
  Top Layer w15: v1(6896.39,3485.13) U22.U15@6916.08,3504.82
  Top Layer w20: R69.2@6402,3687 v3(6478.5,3687) ; 6422.31,3687 ccw(c6422.31,3667.69) 6408.66,3681.34 cw(c6422.31,3667.69) 6422.31,3687 ; 6422.31,3687 cw(c6422.31,3706.31) 6408.66,3692.66 ccw(c6422.31,3706.31) 6422.31,3687
  Mid-Layer 1 w7: v3@6478.5,3675.5 cw(c6478.5,3647.74) 6498.13,3667.37 cw(c6517.76,3687) v3@6490,3687 ; v3(6478.5,3687) 6661.03,3504.47 6877.05,3504.47 v1(6896.39,3485.13) ; 6885.56,3495.96 cw(c6874.74,3485.13) 6890.05,3485.13 ccw(c6874.74,3485.13) 6885.56,3495.96 ; 6885.56,3495.96 ccw(c6896.39,3506.79) 6896.39,3491.47 cw(c6896.39,3506.79) 6885.56,3495.96
FPGA_MISO0: U14.15 U22.AB20 | length 1192.7
  Top Layer w15: v1(6699.54,3288.28) U22.AB20@6719.23,3307.97
  Top Layer w20: v3(5827,3494) U14.15@5827,3565.76
  Mid-Layer 2 w7: v3(5827,3494) 5910,3494 6080,3324 6663.82,3324 v1(6699.54,3288.28) ; 5854.76,3494 cw(c5854.76,3521.76) 5835.13,3502.13 ccw(c5854.76,3521.76) 5854.76,3494 ; 5854.76,3494 ccw(c5854.76,3466.24) 5835.13,3485.87 cw(c5854.76,3466.24) 5854.76,3494 ; 6688.71,3299.11 cw(c6677.89,3288.28) 6693.2,3288.28 ccw(c6677.89,3288.28) 6688.71,3299.11 ; 6688.71,3299.11 ccw(c6699.54,3309.94) 6699.54,3294.62 cw(c6699.54,3309.94) 6688.71,3299.11
FPGA_MISO1: R50.1 R51.1 U22.AA20 | length 1117.7
  Top Layer w15: v1(6738.91,3288.28) U22.AA20@6758.6,3307.97
  Top Layer w20: R51.1@6184,3476 6184,3508.75 ; R50.1@6184,3581.5 6184,3548.75 ; v3(6236,3528) 6235.25,3528.75 6204,3528.75 ; 6184,3495.31 ccw(c6203.31,3495.31) 6189.66,3481.66 cw(c6203.31,3495.31) 6184,3495.31 ; 6184,3495.31 cw(c6164.69,3495.31) 6178.34,3481.66 ccw(c6164.69,3495.31) 6184,3495.31 ; 6184,3508.75 6184,3528.75 ; 6184,3508.75 6204,3528.75 ; 6184,3528.75 6204,3528.75 ; 6184,3528.75 6184,3548.75 ; 6184,3548.75 6204,3528.75 ; 6184,3562.19 ccw(c6164.69,3562.19) 6178.34,3575.84 cw(c6164.69,3562.19) 6184,3562.19 ; 6184,3562.19 cw(c6203.31,3562.19) 6189.66,3575.84 ccw(c6203.31,3562.19) 6184,3562.19
  Mid-Layer 1 w7: v3(6236,3528) 6442,3322 6614,3322 6667.75,3268.25 6718.88,3268.25 v1(6738.91,3288.28) ; 6255.63,3508.37 cw(c6275.26,3528) 6247.5,3528 ccw(c6275.26,3528) 6255.63,3508.37 ; 6255.63,3508.37 ccw(c6236,3488.74) 6236,3516.5 cw(c6236,3488.74) 6255.63,3508.37 ; 6728.08,3277.45 cw(c6738.91,3266.63) 6738.91,3281.94 ccw(c6738.91,3266.63) 6728.08,3277.45 ; 6728.08,3277.45 ccw(c6717.26,3288.28) 6732.57,3288.28 cw(c6717.26,3288.28) 6728.08,3277.45
FPGA_MISO2: U22.U14 | length 908.9
  Top Layer w15: v1(6896.39,3524.5) U22.U14@6916.08,3544.19
  Mid-Layer 1 w7: v3(6261,3687) 6313,3739 6467.62,3739 6662.72,3543.89 6877,3543.89 v1(6896.39,3524.5) ; 6280.63,3706.63 cw(c6261,3726.26) 6261,3698.5 ccw(c6261,3726.26) 6280.63,3706.63 ; 6280.63,3706.63 ccw(c6300.26,3687) 6272.5,3687 cw(c6300.26,3687) 6280.63,3706.63 ; 6885.56,3535.33 cw(c6874.74,3524.5) 6890.05,3524.5 ccw(c6874.74,3524.5) 6885.56,3535.33 ; 6885.56,3535.33 ccw(c6896.39,3546.16) 6896.39,3530.84 cw(c6896.39,3546.16) 6885.56,3535.33
FPGA_MISO3: U22.U13 | length 622.6
  Top Layer w15: v1(6896.39,3563.88) U22.U13@6916.08,3583.56
  Mid-Layer 1 w7: v3@6472.12,3782.34 cw(c6467.39,3773.4) 6477.5,3773.4 ; v3(6477.5,3792.5) 6477.5,3773.4 ; v3@6482.88,3782.34 ccw(c6487.61,3773.4) 6477.5,3773.4 ; v1(6896.39,3563.88) 6876.37,3583.9 6667,3583.9 6477.5,3773.4 ; 6885.57,3574.7 cw(c6874.74,3563.88) 6890.05,3563.88 ccw(c6874.74,3563.88) 6885.57,3574.7 ; 6885.57,3574.7 ccw(c6896.39,3585.53) 6896.39,3570.22 cw(c6896.39,3585.53) 6885.57,3574.7
FPGA_ONCHIP_TERM1: R80.1 U22.W3 | length 593
  Top Layer w15: v1(6817.65,3996.95) U22.W3@6837.34,3977.26
  Top Layer w20: v7(6768,4195) R80.1@6768,4310 ; 6768,4289.69 ccw(c6748.69,4289.69) 6762.34,4303.34 cw(c6748.69,4289.69) 6768,4289.69 ; 6768,4289.69 cw(c6787.31,4289.69) 6773.66,4303.34 ccw(c6787.31,4289.69) 6768,4289.69
  Mid-Layer 1 w7: v7(6768,4195) 6798.31,4164.69 6798.31,4020.61 6817.65,4001.27 v1(6817.65,3996.95) ; 6808.83,4006.2 ccw(c6823.23,4010.06) v1@6817.39,3996.34 ; v7@6768,4186.5 cw(c6768,4165.98) 6782.51,4180.49 ; v7@6768,4186.5 cw(c6768,4165.98) 6782.51,4180.49 ; v7@6768,4186.5 cw(c6768,4165.98) 6782.51,4180.49 ; v7@6776.5,4195 ccw(c6797.02,4195) 6782.51,4180.49 ; v7@6776.5,4195 ccw(c6797.02,4195) 6782.51,4180.49 ; v7@6776.5,4195 ccw(c6797.02,4195) 6782.51,4180.49 ; 6803.77,4015.16 cw(c6785.56,3996.95) v1@6811.31,3996.95 ; 6803.77,4015.16 cw(c6785.56,3996.95) v1@6811.31,3996.95 ; 6803.77,4015.16 cw(c6785.56,3996.95) v1@6811.31,3996.95
FPGA_ONCHIP_TERM2: R65.1 U22.Y2 | length 667
  Top Layer w10: v7@6453,4274 6453,4281.62 ; 6453,4281.62 ccw(c6421.62,4281.62) 6443.81,4303.81 cw(c6421.62,4281.62) 6453,4281.62 ; 6453,4281.62 cw(c6484.38,4281.62) 6462.19,4303.81 ccw(c6484.38,4281.62) 6453,4281.62
  Top Layer w15: v1(6778.28,4036.32) U22.Y2@6797.97,4016.63
  Mid-Layer 1 w7: v7(6460.09,4266.91) 6497,4230 ; 6480,4247 6497,4230 ; v1(6778.28,4036.32) 6758.6,4056 6758.6,4095.4 6624,4230 6497,4230 ; 6767.45,4047.14 cw(c6756.63,4036.32) v1@6771.94,4036.32 ; 6767.45,4047.14 ccw(c6778.28,4057.97) v1@6778.28,4042.66 ; 6767.45,4047.14 cw(c6756.63,4036.32) v1@6771.94,4036.32 ; 6767.45,4047.14 ccw(c6778.28,4057.97) v1@6778.28,4042.66 ; 6767.45,4047.14 ccw(c6778.28,4057.97) v1@6778.28,4042.66 ; 6767.45,4047.14 cw(c6756.63,4036.32) v1@6771.94,4036.32
FPGA_PROG_B: R60.1 R158.2 SW1.1 U22.AA1 | length 1595.4
  Top Layer w7: SW1.1@5748,4415.97 cw(c5748,4353.14) 5792.43,4397.57 cw(c5836.86,4442) SW1.1@5774.03,4442 ; SW1.1@5748,4422.97 cw(c5748,4377.04) 5780.48,4409.52 cw(c5812.96,4442) SW1.1@5767.03,4442 ; SW1.1@5748,4442 5795,4395 6372,4395 6402,4365 6401,4364 v3@6401,4268 ; R158.2@6343,4369 6343,4394 ; R60.1@6409,4108 6426,4108 v13(6446.5,4128.5)
  Top Layer w15: v1(6738.91,4075.69) U22.AA1@6758.6,4056
  Mid-Layer 1 w7: v3@6401,4251 v3@6401,4243 ; v3@6401,4268 v3(6401,4256) v3@6401,4243 ; v13(6446.5,4128.5) 6452,4134 6452,4192 ; v1@6734.43,4080.17 ccw(c6723.6,4091) 6738.91,4091 ccw(c6754.22,4091) v1@6743.4,4080.17 ; v1(6738.91,4075.69) 6738.91,4096.7 6643.62,4192 6452,4192 ; v3@6401,4243 6452,4192
FPGA_SPI_CS: R47.1 U14.7 U22.T5 | length 1945.2
  Top Layer w15: U14.7@5577,3926 5577,4004 5603,4030 5861,4030 5941,3950 6172,3950 6184,3938 R47.1@6184,3898 ; v1(6935.76,3918.21) U22.T5@6955.45,3898.52 ; 6184,3923.35 ccw(c6209.35,3923.35) 6191.42,3905.42 cw(c6209.35,3923.35) 6184,3923.35 ; 6184,3923.35 cw(c6158.65,3923.35) 6176.58,3905.42 ccw(c6158.65,3923.35) 6184,3923.35
  Top Layer w20: R47.1@6184,3898 v3(6258,3898) ; 6204.31,3898 ccw(c6204.31,3878.69) 6190.66,3892.34 cw(c6204.31,3878.69) 6204.31,3898 ; 6204.31,3898 cw(c6204.31,3917.31) 6190.66,3903.66 ccw(c6204.31,3917.31) 6204.31,3898
  Mid-Layer 1 w7: v3@6255.58,3898.64 cw(c6274.59,3893.58) 6269.5,3912.58 ; v3(6258,3898) 6258,3896 6300.23,3938.23 6915.73,3938.23 v1(6935.76,3918.21) ; v3@6258,3909.5 ccw(c6258,3942.09) 6281.05,3919.05 ; v3@6258,3909.5 ccw(c6258,3942.09) 6281.05,3919.05 ; v3@6258,3909.5 ccw(c6258,3942.09) 6281.05,3919.05 ; v3@6269.5,3898 cw(c6292.44,3898) 6276.22,3914.22 ; v3@6269.5,3898 cw(c6292.44,3898) 6276.22,3914.22 ; v3@6269.5,3898 cw(c6292.44,3898) 6276.22,3914.22 ; 6924.93,3929.03 cw(c6914.11,3918.21) v1@6929.42,3918.21 ; 6924.93,3929.03 ccw(c6935.76,3939.86) v1@6935.76,3924.55 ; 6924.93,3929.03 cw(c6914.11,3918.21) v1@6929.42,3918.21 ; 6924.93,3929.03 ccw(c6935.76,3939.86) v1@6935.76,3924.55 ; 6924.93,3929.03 ccw(c6935.76,3939.86) v1@6935.76,3924.55 ; 6924.93,3929.03 cw(c6914.11,3918.21) v1@6929.42,3918.21
FPGA_SUSPEND: R61.2 R143.2 U22.N15 | length 1171.4
  Top Layer w7: R61.2@6402,3581.5 6402.5,3581 R143.2@6498,3581 v3(6533,3581) ; R61.2@6408.3,3586.8 ccw(c6422.31,3600.81) 6422.31,3581 ; R61.2@6413.25,3571.25 cw(c6436.8,3547.7) 6436.8,3581 ; R61.2@6413.25,3591.75 ccw(c6439.21,3617.71) 6439.21,3581 ; R143.2@6487.75,3570.75 ccw(c6462.99,3545.99) 6462.99,3581 ccw(c6462.99,3616.01) R143.2@6487.75,3591.25 ; R143.2@6492.7,3575.7 ccw(c6479.89,3562.89) 6479.89,3581 ccw(c6479.89,3599.11) R143.2@6492.7,3586.3 ; R143.2@6503.3,3575.7 cw(c6516.1,3562.9) 6516.1,3581 cw(c6516.1,3599.1) R143.2@6503.3,3586.3 ; R143.2@6508.25,3570.75 cw(c6533,3546.01) v3(6533,3581) ; R143.2@6508.25,3591.25 ccw(c6533,3615.99) v3(6533,3581) ; v3@6524.87,3572.87 ccw(c6505.24,3553.24) 6505.24,3581 ccw(c6505.24,3608.76) v3@6524.87,3589.13
  Top Layer w15: v1(7053.87,3485.13) U22.N15@7073.56,3504.82
  Mid-Layer 1 w7: v3@6533,3569.5 cw(c6533,3507.94) 6576.53,3551.47 ; v3@6533,3576.5 cw(c6533,3531.84) 6564.58,3563.42 ; v3(6533,3581) v3@6535,3581 ; v3@6533,3583.5 cw(c6533,3555.74) 6552.63,3575.37 ; v3@6536,3582 v3@6535,3581 ; v1(7053.87,3485.13) 7034.53,3465.79 6662.21,3465.79 6547,3581 v3@6535,3581 ; 7043.05,3474.3 cw(c7053.87,3463.48) 7053.87,3478.79 ccw(c7053.87,3463.48) 7043.05,3474.3 ; 7043.05,3474.3 ccw(c7032.22,3485.13) 7047.53,3485.13 cw(c7032.22,3485.13) 7043.05,3474.3
FPGA_TCK: J5.3 U22.G15 | length 2511.9
  Top Layer w15: U22.G15@7309.78,3504.82 7329.6,3485 v1(7330,3485)
  Mid-Layer 2 w7: v1(7330,3485) 7388.66,3426.34 7388.66,3357.34 7399,3347 7934.38,3347 8606.3,2675.09 8606.3,2333.31 J5.3@8745.8,2193.8 ; 8684.57,2255.04 ccw(c8745.8,2316.27) J5.3@8745.8,2229.67 ; 8696.52,2243.09 ccw(c8745.8,2292.37) J5.3@8745.8,2222.67 ; 8707.19,2232.42 cw(c8677.95,2203.17) J5.3@8719.3,2203.17 ; 8708.47,2231.14 ccw(c8745.8,2268.47) J5.3@8745.8,2215.67 ; 8719.14,2220.47 cw(c8701.85,2203.17) J5.3@8726.3,2203.17 ; 8720.42,2219.19 ccw(c8745.8,2244.57) J5.3@8745.8,2208.67 ; 7340.83,3474.17 cw(c7351.65,3485) 7336.34,3485 ccw(c7351.65,3485) 7340.83,3474.17 ; 7340.83,3474.17 ccw(c7330,3463.35) 7330,3478.66 cw(c7330,3463.35) 7340.83,3474.17
FPGA_TDI: J5.5 U22.E18 | length 2517.3
  Top Layer w15: U22.E18@7388.52,3386.71 v1(7408,3367.23) v1@7408,3367
  Mid-Layer 1 w7: v1(7408,3367.23) 7428.23,3347 8026,3347 8297,3076 8297,2183 8347,2133 8485,2133 J5.5@8545.8,2193.8 ; 8484.57,2132.57 cw(c8545.8,2071.33) J5.5@8545.8,2157.93 ; 8496.52,2144.52 cw(c8545.8,2095.23) J5.5@8545.8,2164.93 ; 8507.19,2155.19 ccw(c8477.95,2184.43) J5.5@8519.3,2184.43 ; 8508.47,2156.47 cw(c8545.8,2119.13) J5.5@8545.8,2171.93 ; 8519.14,2167.14 ccw(c8501.85,2184.43) J5.5@8526.3,2184.43 ; 8520.42,2168.42 cw(c8545.8,2143.03) J5.5@8545.8,2178.93 ; 7418.83,3356.4 cw(c7429.65,3367.23) 7414.34,3367.23 ccw(c7429.65,3367.23) 7418.83,3356.4 ; 7418.83,3356.4 ccw(c7408,3345.57) 7408,3360.89 cw(c7408,3345.57) 7418.83,3356.4
FPGA_TDO: J5.4 U22.A19 | length 2117.6
  Top Layer w15: U22.A19@7546,3347.34 7546,3347 v1@7565,3328
  Mid-Layer 2 w7: v1(7565,3327) 7936,3327 8506.3,2756.7 8506.3,2333.31 J5.4@8645.8,2193.8 ; 8584.57,2255.04 ccw(c8645.8,2316.27) J5.4@8645.8,2229.67 ; 8596.52,2243.09 ccw(c8645.8,2292.37) J5.4@8645.8,2222.67 ; 8607.19,2232.42 cw(c8577.95,2203.17) J5.4@8619.3,2203.17 ; 8608.47,2231.14 ccw(c8645.8,2268.47) J5.4@8645.8,2215.67 ; 8619.14,2220.47 cw(c8601.85,2203.17) J5.4@8626.3,2203.17 ; 8620.42,2219.19 ccw(c8645.8,2244.57) J5.4@8645.8,2208.67 ; 7580.31,3327 cw(c7580.31,3342.31) 7569.48,3331.48 ccw(c7580.31,3342.31) 7580.31,3327 ; 7580.31,3327 ccw(c7580.31,3311.69) 7569.48,3322.52 cw(c7580.31,3311.69) 7580.31,3327
FPGA_TMS: J5.6 U22.C18 | length 2248.5
  Top Layer w15: U22.C18@7467.26,3386.71 v1(7484.97,3369)
  Mid-Layer 1 w7: v1(7484.97,3369) 7502.33,3386.36 8013.64,3386.36 8316,3084 8316,2226 8355,2187 8439,2187 J5.6@8445.8,2193.8 ; 8375.63,2187 cw(c8375.63,2114.26) J5.6@8427.06,2165.69 ; 8388.02,2187 ccw(c8388.02,2242.21) J5.6@8427.06,2203.17 ; 8392.53,2187 cw(c8392.53,2131.16) J5.6@8432.01,2170.64 ; 8404.92,2187 ccw(c8404.92,2225.31) J5.6@8432.01,2198.22 ; 8409.43,2187 cw(c8409.43,2148.06) J5.6@8436.96,2175.59 ; 7495.8,3379.83 cw(c7484.97,3390.65) 7484.97,3375.34 ccw(c7484.97,3390.65) 7495.8,3379.83 ; 7495.8,3379.83 ccw(c7506.62,3369) 7491.31,3369 cw(c7506.62,3369) 7495.8,3379.83
FT#: U22.L3 U34.14 | length 946
  Top Layer w15: U22.L3@7152.3,3977.26 v1(7171.99,3996.95)
  Mid-Layer 1 w7: v1(6828,4486) 6828,4434.23 7152.64,4109.59 7152.64,4016.29 v1(7171.99,3996.95) ; v1@6823.52,4481.52 cw(c6812.69,4470.69) 6828,4470.69 ; v1@6823.52,4481.52 cw(c6812.69,4470.69) 6828,4470.69 ; v1@6823.52,4481.52 cw(c6812.69,4470.69) 6828,4470.69 ; 6828,4470.69 cw(c6843.31,4470.69) v1@6832.48,4481.52 ; 6828,4470.69 cw(c6843.31,4470.69) v1@6832.48,4481.52 ; 6828,4470.69 cw(c6843.31,4470.69) v1@6832.48,4481.52 ; 7161.16,4007.77 cw(c7150.33,3996.95) v1@7165.64,3996.95 ; 7161.16,4007.77 ccw(c7171.99,4018.6) v1@7171.99,4003.29 ; 7161.16,4007.77 cw(c7150.33,3996.95) v1@7165.64,3996.95 ; 7161.16,4007.77 ccw(c7171.99,4018.6) v1@7171.99,4003.29 ; 7161.16,4007.77 ccw(c7171.99,4018.6) v1@7171.99,4003.29 ; 7161.16,4007.77 cw(c7150.33,3996.95) v1@7165.64,3996.95
  Bottom Layer w10: v1(6828,4486) 6828.39,4486.39 U34.14@6828.39,4573.06 ; v1@6824.58,4489.42 ccw(c6815.38,4498.62) 6828.39,4498.62 ; v1@6824.58,4489.42 ccw(c6815.38,4498.62) 6828.39,4498.62 ; v1@6824.58,4489.42 ccw(c6815.38,4498.62) 6828.39,4498.62 ; 6828.39,4496.76 ccw(c6838.76,4496.76) v1@6831.42,4489.42 ; 6828.39,4496.76 ccw(c6838.76,4496.76) v1@6831.42,4489.42 ; 6828.39,4496.76 ccw(c6838.76,4496.76) v1@6831.42,4489.42
G#: U22.C3 U34.86 | length 1405.3
  Top Layer w15: U22.C3@7467.26,3977.26 v1(7486.95,3996.95)
  Mid-Layer 1 w7: v1(7287,5004) 7402,5004 ; 7401.84,5004.16 7402,5004 ; v1(7486.95,3996.95) 7467.6,4016.29 7467.6,4938.4 7402,5004 ; 7302.31,5004 cw(c7302.31,5019.31) 7291.48,5008.48 ccw(c7302.31,5019.31) 7302.31,5004 ; 7302.31,5004 ccw(c7302.31,4988.69) 7291.48,4999.52 cw(c7302.31,4988.69) 7302.31,5004 ; 7476.12,4007.77 cw(c7465.29,3996.95) v1@7480.6,3996.95 ; 7476.12,4007.77 ccw(c7486.95,4018.6) v1@7486.95,4003.29 ; 7476.12,4007.77 cw(c7465.29,3996.95) v1@7480.6,3996.95 ; 7476.12,4007.77 ccw(c7486.95,4018.6) v1@7486.95,4003.29 ; 7476.12,4007.77 ccw(c7486.95,4018.6) v1@7486.95,4003.29 ; 7476.12,4007.77 cw(c7465.29,3996.95) v1@7480.6,3996.95
  Bottom Layer w10: U34.86@7224.06,5004.16 7286.84,5004.16 v1(7287,5004) ; 7274.93,5004.16 cw(c7274.93,4991.93) 7283.58,5000.58 ccw(c7274.93,4991.93) 7274.93,5004.16 ; 7275.69,5004.16 ccw(c7275.69,5015.31) 7283.58,5007.42 cw(c7275.69,5015.31) 7275.69,5004.16
GCLK4: U22.J22
GCLK5: U22.J20
GCLK6: U22.L19